# Altium PCB TX_Board.PcbDoc (part 3 of 5)
Units mm, origin at the board's own origin, x right, y up, seen from the top; angles counter-clockwise.
Board outline 69 x 69 mm, 4 copper layers (Top Layer, Int1 (GND), Int2 (GND), Bottom Layer), stack 1.591 mm thick; 102 components, 48 nets, 289 pads, 82 vias.
Unrouted connection lines stored in the file: 40.
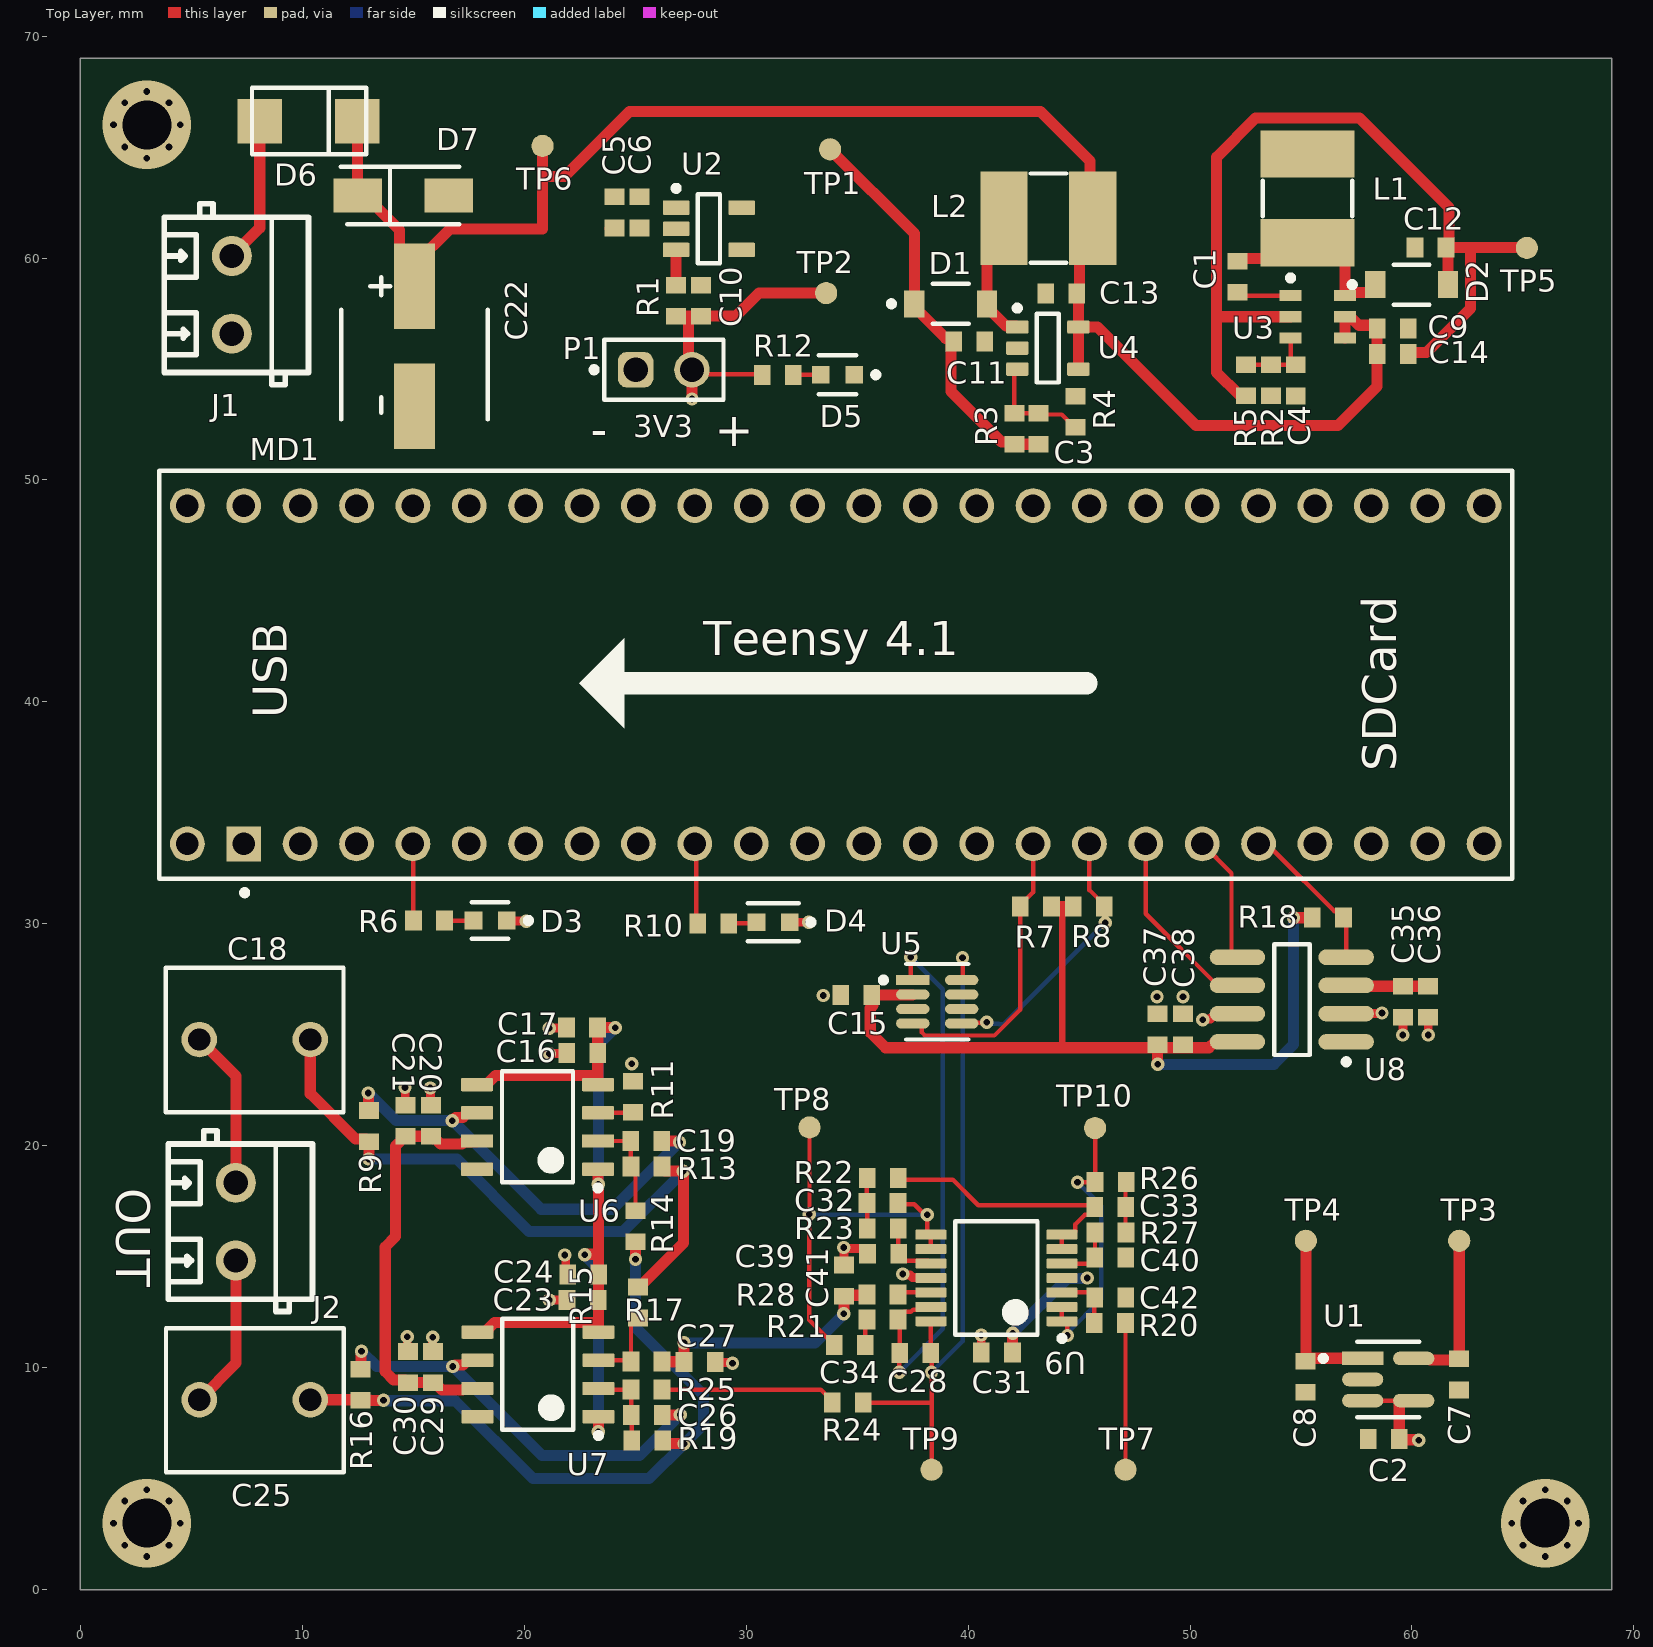
[diagram p0: Top Layer view]

## Part data (continued)
R2: library part RC0603FR-07309KL, "Res Thick Film 0603 309K Ohm 1% 0.1W(1/10W) ±100ppm/C Pad SMD T/R", Case Code (Imperial)=0603, JLCPCB Part Number=C273754, Manufacturer="Yageo Group", Max Operating Temperature=155°C, Max Power Dissipation=100mW, Min Operating Temperature=-55°C, Temperature Coefficient=100ppm/°C, Tolerance=1%, Voltage Rating=75V, Voltage Rating (DC)=50V, Case/Package=0603, Category="Chip SMD Resistors", China RoHS=Non-Compliant, ComponentLink1Description=https://datasheet.octopart.com:443/RC0603FR-07309KL-Yageo-datasheet-175887523.pdf?src-supplier=Newark, ComponentLink1URL=https://datasheet.octopart.com:443/RC0603FR-07309KL-Yageo-datasheet-175887523.pdf?src-supplier=Newark, ComponentLink2Description=https://datasheet.octopart.com:443/RC0603FR-07309KL-Yageo-datasheet-103092701.pdf?src-supplier=Upverter, ComponentLink2URL=https://datasheet.octopart.com:443/RC0603FR-07309KL-Yageo-datasheet-103092701.pdf?src-supplier=Upverter, ComponentLink3Description=https://datasheet.octopart.com:443/RC0603FR-07309KL-Yageo-Group-datasheet-176638170.pdf?src-supplier=Future+Electronics, ComponentLink3URL=https://datasheet.octopart.com:443/RC0603FR-07309KL-Yageo-Group-datasheet-176638170.pdf?src-supplier=Future+Electronics, ComponentLink4Description=https://datasheet.octopart.com:443/RC0603FR-07309KL-Yageo-datasheet-164759695.pdf?src-supplier=Future+Electronics, ComponentLink4URL=https://datasheet.octopart.com:443/RC0603FR-07309KL-Yageo-datasheet-164759695.pdf?src-supplier=Future+Electronics, ComponentLink5Description=https://datasheet.octopart.com:443/RC0603FR-07309KL-Yageo-datasheet-137700087.pdf?src-supplier=Future+Electronics, ComponentLink5URL=https://datasheet.octopart.com:443/RC0603FR-07309KL-Yageo-datasheet-137700087.pdf?src-supplier=Future+Electronics, ComponentLink6Description=https://datasheet.octopart.com:443/RC0603FR-07309KL-Yageo-datasheet-127823281.pdf?src-supplier=Future+Electronics, ComponentLink6URL=https://datasheet.octopart.com:443/RC0603FR-07309KL-Yageo-datasheet-127823281.pdf?src-supplier=Future+Electronics, ComponentLink7Description=https://datasheet.octopart.com:443/RC0603FR-07309KL-Yageo-datasheet-15599030.pdf?src-supplier=Future+Electronics, ComponentLink7URL=https://datasheet.octopart.com:443/RC0603FR-07309KL-Yageo-datasheet-15599030.pdf?src-supplier=Future+Electronics, ComponentLink8Description=https://datasheet.octopart.com:443/RC0603FR-07309KL-Yageo-datasheet-12596169.pdf?src-supplier=Future+Electronics, ComponentLink8URL=https://datasheet.octopart.com:443/RC0603FR-07309KL-Yageo-datasheet-12596169.pdf?src-supplier=Future+Electronics, ComponentLink9Description=https://datasheet.octopart.com:443/RC0603FR-07309KL-Yageo-datasheet-8328172.pdf?src-supplier=Future+Electronics, ComponentLink9URL=https://datasheet.octopart.com:443/RC0603FR-07309KL-Yageo-datasheet-8328172.pdf?src-supplier=Future+Electronics, ComponentLink10Description=https://datasheet.octopart.com/RC0603FR-07309KL-Yageo-datasheet-73766026.pdf, ComponentLink10URL=https://datasheet.octopart.com/RC0603FR-07309KL-Yageo-datasheet-73766026.pdf, ComponentLink11Description=https://datasheet.octopart.com:443/RC0603FR-07309KL-Yageo-datasheet-118562.pdf?src-supplier=DigiKey, ComponentLink11URL=https://datasheet.octopart.com:443/RC0603FR-07309KL-Yageo-datasheet-118562.pdf?src-supplier=DigiKey, ComponentLink12Description=http://sigma.octopart.com:80/conflict_mineral_statement/Yageo-company-3.pdf?src-supplier=Compliance+Statements, ComponentLink12URL=http://sigma.octopart.com:80/conflict_mineral_statement/Yageo-company-3.pdf?src-supplier=Compliance+Statements, ComponentLink13Description=http://sigma.octopart.com:80/rohs_statement/Yageo-company-2.pdf?src-supplier=Compliance+Statements, ComponentLink13URL=http://sigma.octopart.com:80/rohs_statement/Yageo-company-2.pdf?src-supplier=Compliance+Statements, Composition="Thick Film", Country of Origin="Mainland China, Taiwan", Depth=800µm, Export Control Classification Number (ECCN) Code=EAR99, Features="Moisture Resistant", Harmonized Tariff Schedule (HTS) Code=8533.21.00.30, Height=450µm, Introduction Date=2004-09-22, Lead Free="Lead Free", Length=1.6mm, Lifecycle Status=Production, Manufacturer Part Number=RC0603FR-07309KL, Military Standard=Not, Mounting Technology="Surface Mount", Number of Terminals=2, Number of Terminations=2, Power Rating=100mW, Pricing="1=0.101, 25=0.015, 100=0.011, 250=0.010, 500=0.009, 1000=0.008, 2500=0.006 (USD)", REACH SVHC=Unaffected, RoHS=Compliant, Schedule B="8533210045, 8533210045|8533210045, 8533210045|8533210045|8533210045, 8533210045|8533210045|8533210045|8533210045", Stock=4091, Supplier=Avnet, Supplier Part Number=RC0603FR-07309KL, Termination=SMD/SMT, Width=800µm, Working Voltage=75V
R3: library part RT0603BRE07205KL, "100mW Thin Film Resistor ±50ppm/℃ ±0.1% 205kΩ 0603 Chip Resistor - Surface Mount ROHS", Case Code (Metric)=0603, JLCPCB Part Number=C861745, Manufacturer="Yageo Group", Max Operating Temperature=155°C, Max Power Dissipation=100mW, Min Operating Temperature=-55°C, Temperature Coefficient=50ppm/°C, Tolerance=0.1%, Voltage Rating=75V, Voltage Rating (DC)=50V, Case/Package=0603, Category="Chip SMD Resistors", China RoHS=Non-Compliant, ComponentLink1Description=https://datasheet.octopart.com:443/RT0603BRE07205KL-Yageo-datasheet-176402239.pdf?src-supplier=IHS, ComponentLink1URL=https://datasheet.octopart.com:443/RT0603BRE07205KL-Yageo-datasheet-176402239.pdf?src-supplier=IHS, ComponentLink2Description=https://datasheet.octopart.com:443/RT0603BRE07205KL-Yageo-datasheet-96443642.pdf?src-supplier=Upverter, ComponentLink2URL=https://datasheet.octopart.com:443/RT0603BRE07205KL-Yageo-datasheet-96443642.pdf?src-supplier=Upverter, ComponentLink3Description=https://datasheet.octopart.com:443/RT0603BRE07205KL-Yageo-Group-datasheet-188167888.pdf?src-supplier=LCSC, ComponentLink3URL=https://datasheet.octopart.com:443/RT0603BRE07205KL-Yageo-Group-datasheet-188167888.pdf?src-supplier=LCSC, ComponentLink4Description=https://datasheet.octopart.com:443/RT0603BRE07205KL-Yageo-Group-datasheet-141265893.pdf?src-supplier=ODG+(Origin+Data+Global), ComponentLink4URL=https://datasheet.octopart.com:443/RT0603BRE07205KL-Yageo-Group-datasheet-141265893.pdf?src-supplier=ODG+(Origin+Data+Global), ComponentLink5Description=https://datasheet.octopart.com/RT0603BRE07205KL-Yageo-datasheet-86813807.pdf, ComponentLink5URL=https://datasheet.octopart.com/RT0603BRE07205KL-Yageo-datasheet-86813807.pdf, ComponentLink6Description=http://sigma.octopart.com:80/conflict_mineral_statement/Yageo-company-3.pdf?src-supplier=Compliance+Statements, ComponentLink6URL=http://sigma.octopart.com:80/conflict_mineral_statement/Yageo-company-3.pdf?src-supplier=Compliance+Statements, ComponentLink7Description=http://sigma.octopart.com:80/rohs_statement/Yageo-company-2.pdf?src-supplier=Compliance+Statements, ComponentLink7URL=http://sigma.octopart.com:80/rohs_statement/Yageo-company-2.pdf?src-supplier=Compliance+Statements, Composition="Thin Film", Contact Plating=Tin, Country of Origin="Mainland China, Taiwan", Export Control Classification Number (ECCN) Code=EAR99, Harmonized Tariff Schedule (HTS) Code=8533.21.00.30, Height=450µm, Introduction Date=2008-07-11, Lead Free="Lead Free", Length=1.6mm, Lifecycle Status=Production, Manufacturer Part Number=RT0603BRE07205KL, Mounting Technology="Surface Mount", Number of Terminals=2, Number of Terminations=2, Packaging="Tape & Reel (TR)", Power Rating=100mW, Pricing="5000=0.0472, 10000=0.04696, 20000=0.04673, 40000=0.04649, 80000=0.04626 (USD)", Radiation Hardening=No, REACH SVHC=Unaffected, RoHS=Compliant, Supplier=Avnet, Supplier Part Number=RT0603BRE07205KL, Width=800µm, Working Voltage=75V
R4: library part RC0603FR-0712KL, "100mW Thick Film Resistors 75V ±100ppm/℃ ±1% 12kΩ 0603 Chip Resistor - Surface Mount ROHS", Case Code (Imperial)=0603, Case Code (Metric)=1608, JLCPCB Part Number=C114659, Manufacturer="Yageo Group", Max Operating Temperature=155°C, Max Power Dissipation=100mW, Min Operating Temperature=-55°C, Temperature Coefficient=100ppm/°C, Tolerance=1%, Voltage Rating=50V, Working Voltage=75V, Case/Package=0603, Category="Chip SMD Resistors", China RoHS=Non-Compliant, ComponentLink1Description=https://datasheet.octopart.com:443/RC0603FR-0712KL-Yageo-datasheet-175887523.pdf?src-supplier=IHS, ComponentLink1URL=https://datasheet.octopart.com:443/RC0603FR-0712KL-Yageo-datasheet-175887523.pdf?src-supplier=IHS, ComponentLink2Description=https://datasheet.octopart.com:443/RC0603FR-0712KL-Yageo-datasheet-8328172.pdf?src-supplier=Newark, ComponentLink2URL=https://datasheet.octopart.com:443/RC0603FR-0712KL-Yageo-datasheet-8328172.pdf?src-supplier=Newark, ComponentLink3Description=https://datasheet.octopart.com:443/RC0603FR-0712KL-Yageo-datasheet-175423674.pdf?src-supplier=Newark, ComponentLink3URL=https://datasheet.octopart.com:443/RC0603FR-0712KL-Yageo-datasheet-175423674.pdf?src-supplier=Newark, ComponentLink4Description=https://datasheet.octopart.com:443/RC0603FR-0712KL-Yageo-datasheet-34211833.pdf?src-supplier=Newark, ComponentLink4URL=https://datasheet.octopart.com:443/RC0603FR-0712KL-Yageo-datasheet-34211833.pdf?src-supplier=Newark, ComponentLink5Description=https://datasheet.octopart.com:443/RC0603FR-0712KL-Yageo-datasheet-62067350.pdf?src-supplier=element14+APAC, ComponentLink5URL=https://datasheet.octopart.com:443/RC0603FR-0712KL-Yageo-datasheet-62067350.pdf?src-supplier=element14+APAC, ComponentLink6Description=https://datasheet.octopart.com:443/RC0603FR-0712KL-Yageo-datasheet-103092701.pdf?src-supplier=Upverter, ComponentLink6URL=https://datasheet.octopart.com:443/RC0603FR-0712KL-Yageo-datasheet-103092701.pdf?src-supplier=Upverter, ComponentLink7Description=https://datasheet.octopart.com:443/RC0603FR-0712KL-Yageo-datasheet-141435368.pdf?src-supplier=Upverter, ComponentLink7URL=https://datasheet.octopart.com:443/RC0603FR-0712KL-Yageo-datasheet-141435368.pdf?src-supplier=Upverter, ComponentLink8Description=https://datasheet.octopart.com:443/RC0603FR-0712KL-Yageo-Group-datasheet-190305687.pdf?src-supplier=Future+Electronics, ComponentLink8URL=https://datasheet.octopart.com:443/RC0603FR-0712KL-Yageo-Group-datasheet-190305687.pdf?src-supplier=Future+Electronics, ComponentLink9Description=https://datasheet.octopart.com:443/RC0603FR-0712KL-Yageo-datasheet-164759695.pdf?src-supplier=Future+Electronics, ComponentLink9URL=https://datasheet.octopart.com:443/RC0603FR-0712KL-Yageo-datasheet-164759695.pdf?src-supplier=Future+Electronics, ComponentLink10Description=https://datasheet.octopart.com:443/RC0603FR-0712KL-Yageo-datasheet-137700087.pdf?src-supplier=Future+Electronics, ComponentLink10URL=https://datasheet.octopart.com:443/RC0603FR-0712KL-Yageo-datasheet-137700087.pdf?src-supplier=Future+Electronics, ComponentLink11Description=https://datasheet.octopart.com:443/RC0603FR0712KL-Yageo-datasheet-27584510.pdf?src-supplier=Future+Electronics, ComponentLink11URL=https://datasheet.octopart.com:443/RC0603FR0712KL-Yageo-datasheet-27584510.pdf?src-supplier=Future+Electronics, ComponentLink12Description=https://datasheet.octopart.com:443/RC0603FR-0712KL-Yageo-datasheet-15599030.pdf?src-supplier=Future+Electronics, ComponentLink12URL=https://datasheet.octopart.com:443/RC0603FR-0712KL-Yageo-datasheet-15599030.pdf?src-supplier=Future+Electronics, ComponentLink13Description=https://datasheet.octopart.com:443/RC0603FR-0712KL-Yageo-datasheet-12596169.pdf?src-supplier=Future+Electronics, ComponentLink13URL=https://datasheet.octopart.com:443/RC0603FR-0712KL-Yageo-datasheet-12596169.pdf?src-supplier=Future+Electronics, ComponentLink14Description=https://datasheet.octopart.com:443/RC0603FR-0712KL-Yageo-datasheet-8324193.pdf?src-supplier=Future+Electronics, ComponentLink14URL=https://datasheet.octopart.com:443/RC0603FR-0712KL-Yageo-datasheet-8324193.pdf?src-supplier=Future+Electronics, ComponentLink15Description=https://datasheet.octopart.com:443/RC0603FR-0712KL-Yageo-Group-datasheet-189192902.pdf?src-supplier=LCSC, ComponentLink15URL=https://datasheet.octopart.com:443/RC0603FR-0712KL-Yageo-Group-datasheet-189192902.pdf?src-supplier=LCSC, ComponentLink16Description=https://datasheet.octopart.com:443/RC0603FR-0712KL-Yageo-Group-datasheet-176638170.pdf?src-supplier=Farnell, ComponentLink16URL=https://datasheet.octopart.com:443/RC0603FR-0712KL-Yageo-Group-datasheet-176638170.pdf?src-supplier=Farnell, ComponentLink17Description=https://datasheet.octopart.com/RC0603FR-0712KL-Yageo-datasheet-73766026.pdf, ComponentLink17URL=https://datasheet.octopart.com/RC0603FR-0712KL-Yageo-datasheet-73766026.pdf, ComponentLink18Description=https://datasheet.octopart.com:443/RC0603FR-0712KL-Yageo-datasheet-30459151.pdf?src-supplier=Seeed+Studio, ComponentLink18URL=https://datasheet.octopart.com:443/RC0603FR-0712KL-Yageo-datasheet-30459151.pdf?src-supplier=Seeed+Studio, ComponentLink19Description=https://datasheet.octopart.com:443/RC0603FR-0712KL-Yageo-datasheet-118562.pdf?src-supplier=DigiKey, ComponentLink19URL=https://datasheet.octopart.com:443/RC0603FR-0712KL-Yageo-datasheet-118562.pdf?src-supplier=DigiKey, ComponentLink20Description=http://sigma.octopart.com:80/conflict_mineral_statement/Yageo-company-3.pdf?src-supplier=Compliance+Statements, ComponentLink20URL=http://sigma.octopart.com:80/conflict_mineral_statement/Yageo-company-3.pdf?src-supplier=Compliance+Statements, ComponentLink21Description=http://sigma.octopart.com:80/rohs_statement/Yageo-company-2.pdf?src-supplier=Compliance+Statements, ComponentLink21URL=http://sigma.octopart.com:80/rohs_statement/Yageo-company-2.pdf?src-supplier=Compliance+Statements, Composition="Thick Film", Depth=800µm, Features="Moisture Resistant", Height=450µm, Lead Free="Lead Free", Length=1.6mm, Lifecycle Status=Production, Manufacturer Part Number=RC0603FR-0712KL, Military Standard=Not, Mounting Technology="Surface Mount", Number of Terminals=2, Number of Terminations=2, Packaging="Tape and Reel", Pins=2, Power Rating=100mW, Pricing="1=0.101, 25=0.015, 100=0.011, 250=0.010, 500=0.009, 1000=0.008, 2500=0.006, 5000=0.004 (USD)", REACH SVHC=Unaffected, RoHS=Compliant, Schedule B="8533210045, 8533210045|8533210045|8533210045|8533210045|8533210045", Stock=210017, Supplier=Newark, Supplier Part Number=RC0603FR-0712KL, Termination=SMD/SMT, Voltage Rating (DC)=50V, Width=800µm
R5: library part RC0603FR-0711KL, "Res Thick Film 0603 11K Ohm 1% 0.1W(1/10W) ±100ppm/C Pad SMD T/R", Case Code (Imperial)=0603, JLCPCB Part Number=C137801, Manufacturer="Yageo Group", Max Operating Temperature=155°C, Max Power Dissipation=100mW, Min Operating Temperature=-55°C, Temperature Coefficient=100ppm/°C, Tolerance=1%, Voltage Rating=75V, Voltage Rating (DC)=50V, Case/Package=0603, Category="Chip SMD Resistors", China RoHS=Non-Compliant, ComponentLink1Description=https://datasheet.octopart.com:443/RC0603FR-0711KL-Yageo-datasheet-175887523.pdf?src-supplier=IHS, ComponentLink1URL=https://datasheet.octopart.com:443/RC0603FR-0711KL-Yageo-datasheet-175887523.pdf?src-supplier=IHS, ComponentLink2Description=https://datasheet.octopart.com:443/RC0603FR-0711KL-Yageo-datasheet-103092701.pdf?src-supplier=Upverter, ComponentLink2URL=https://datasheet.octopart.com:443/RC0603FR-0711KL-Yageo-datasheet-103092701.pdf?src-supplier=Upverter, ComponentLink3Description=https://datasheet.octopart.com:443/RC0603FR-0711KL-Yageo-Group-datasheet-190305687.pdf?src-supplier=Future+Electronics, ComponentLink3URL=https://datasheet.octopart.com:443/RC0603FR-0711KL-Yageo-Group-datasheet-190305687.pdf?src-supplier=Future+Electronics, ComponentLink4Description=https://datasheet.octopart.com:443/RC0603FR-0711KL-Yageo-datasheet-164759695.pdf?src-supplier=Future+Electronics, ComponentLink4URL=https://datasheet.octopart.com:443/RC0603FR-0711KL-Yageo-datasheet-164759695.pdf?src-supplier=Future+Electronics, ComponentLink5Description=https://datasheet.octopart.com:443/RC0603FR-0711KL-Yageo-datasheet-127823281.pdf?src-supplier=Future+Electronics, ComponentLink5URL=https://datasheet.octopart.com:443/RC0603FR-0711KL-Yageo-datasheet-127823281.pdf?src-supplier=Future+Electronics, ComponentLink6Description=https://datasheet.octopart.com:443/RC0603FR-0711KL-Yageo-datasheet-137700087.pdf?src-supplier=Future+Electronics, ComponentLink6URL=https://datasheet.octopart.com:443/RC0603FR-0711KL-Yageo-datasheet-137700087.pdf?src-supplier=Future+Electronics, ComponentLink7Description=https://datasheet.octopart.com:443/RC0603FR-0711KL-Yageo-datasheet-98239111.pdf?src-supplier=Future+Electronics, ComponentLink7URL=https://datasheet.octopart.com:443/RC0603FR-0711KL-Yageo-datasheet-98239111.pdf?src-supplier=Future+Electronics, ComponentLink8Description=https://datasheet.octopart.com:443/RC0603FR-0711KL-Yageo-datasheet-77992522.pdf?src-supplier=Future+Electronics, ComponentLink8URL=https://datasheet.octopart.com:443/RC0603FR-0711KL-Yageo-datasheet-77992522.pdf?src-supplier=Future+Electronics, ComponentLink9Description=https://datasheet.octopart.com:443/RC0603FR-0711KL-Yageo-datasheet-67302840.pdf?src-supplier=Future+Electronics, ComponentLink9URL=https://datasheet.octopart.com:443/RC0603FR-0711KL-Yageo-datasheet-67302840.pdf?src-supplier=Future+Electronics, ComponentLink10Description=https://datasheet.octopart.com:443/RC0603FR-0711KL-Yageo-datasheet-17842380.pdf?src-supplier=Future+Electronics, ComponentLink10URL=https://datasheet.octopart.com:443/RC0603FR-0711KL-Yageo-datasheet-17842380.pdf?src-supplier=Future+Electronics, ComponentLink11Description=https://datasheet.octopart.com:443/RC0603FR-0711KL-Yageo-datasheet-15599030.pdf?src-supplier=Future+Electronics, ComponentLink11URL=https://datasheet.octopart.com:443/RC0603FR-0711KL-Yageo-datasheet-15599030.pdf?src-supplier=Future+Electronics, ComponentLink12Description=https://datasheet.octopart.com:443/RC0603FR-0711KL-Yageo-datasheet-12596169.pdf?src-supplier=Future+Electronics, ComponentLink12URL=https://datasheet.octopart.com:443/RC0603FR-0711KL-Yageo-datasheet-12596169.pdf?src-supplier=Future+Electronics, ComponentLink13Description=https://datasheet.octopart.com:443/RC0603FR-0711KL-Yageo-datasheet-8324193.pdf?src-supplier=Future+Electronics, ComponentLink13URL=https://datasheet.octopart.com:443/RC0603FR-0711KL-Yageo-datasheet-8324193.pdf?src-supplier=Future+Electronics, ComponentLink14Description=https://datasheet.octopart.com:443/RC0603FR-0711KL-Yageo-datasheet-8328172.pdf?src-supplier=Newark, ComponentLink14URL=https://datasheet.octopart.com:443/RC0603FR-0711KL-Yageo-datasheet-8328172.pdf?src-supplier=Newark, ComponentLink15Description=https://datasheet.octopart.com:443/RC0603FR-0711KL-Yageo-datasheet-62067350.pdf?src-supplier=Farnell, ComponentLink15URL=https://datasheet.octopart.com:443/RC0603FR-0711KL-Yageo-datasheet-62067350.pdf?src-supplier=Farnell, ComponentLink16Description=https://datasheet.octopart.com:443/RC0603FR-0711KL-Yageo-datasheet-34211833.pdf?src-supplier=element14+APAC, ComponentLink16URL=https://datasheet.octopart.com:443/RC0603FR-0711KL-Yageo-datasheet-34211833.pdf?src-supplier=element14+APAC, ComponentLink17Description=https://datasheet.octopart.com:443/RC0603FR-0711KL-Yageo-Group-datasheet-189192902.pdf?src-supplier=LCSC, ComponentLink17URL=https://datasheet.octopart.com:443/RC0603FR-0711KL-Yageo-Group-datasheet-189192902.pdf?src-supplier=LCSC, ComponentLink18Description=https://datasheet.octopart.com/RC0603FR-0711KL-Yageo-datasheet-73766026.pdf, ComponentLink18URL=https://datasheet.octopart.com/RC0603FR-0711KL-Yageo-datasheet-73766026.pdf, ComponentLink19Description=https://datasheet.octopart.com:443/RC0603FR-0711KL-Yageo-datasheet-118562.pdf?src-supplier=DigiKey, ComponentLink19URL=https://datasheet.octopart.com:443/RC0603FR-0711KL-Yageo-datasheet-118562.pdf?src-supplier=DigiKey, ComponentLink20Description=http://sigma.octopart.com:80/conflict_mineral_statement/Yageo-company-3.pdf?src-supplier=Compliance+Statements, ComponentLink20URL=http://sigma.octopart.com:80/conflict_mineral_statement/Yageo-company-3.pdf?src-supplier=Compliance+Statements, ComponentLink21Description=http://sigma.octopart.com:80/rohs_statement/Yageo-company-2.pdf?src-supplier=Compliance+Statements, ComponentLink21URL=http://sigma.octopart.com:80/rohs_statement/Yageo-company-2.pdf?src-supplier=Compliance+Statements, Composition="Thick Film", Country of Origin="Mainland China, Taiwan", Depth=800µm, Export Control Classification Number (ECCN) Code=EAR99, Features="Moisture Resistant", Harmonized Tariff Schedule (HTS) Code=8533.21.00.30, Height=450µm, Introduction Date=2004-10-04, Lead Free="Lead Free", Length=1.6mm, Lifecycle Status=Production, Manufacturer Part Number=RC0603FR-0711KL, Military Standard=Not, Mounting Technology="Surface Mount", Number of Terminals=2, Number of Terminations=2, Packaging="Tape & Reel", Pins=2, Power Rating=100mW, Pricing="10=0.0098, 11=0.0068, 101=0.0055, 501=0.0042, 1001=0.0032 (USD)", REACH SVHC=Unaffected, RoHS=Compliant, Schedule B="8533210045, 8533210045|8533210045|8533210045|8533210045|8533210045", Stock=22877, Supplier=Newark, Supplier Part Number=RC0603FR-0711KL, Termination=SMD/SMT, Width=800µm, Working Voltage=75V
R6 R10 R12: library part 0603WAF1001T5E, "Res Thick Film 0603 1K Ohm 1% 0.1W(1/10W) ±100ppm/C Pad SMD T/R", Case/Package=0603, JLCPCB Part Number=C21190, Manufacturer="Royal Ohm", Max Operating Temperature=155°C, Min Operating Temperature=-55°C, Power Rating=100mW, Supplier Part Number=303-0603WAF1001T5E, Temperature Coefficient=100ppm/°C, Tolerance=1%, Working Voltage=75V, Category="Chip SMD Resistors", China RoHS=Non-Compliant, ComponentLink1Description=https://datasheet.octopart.com:443/0603WAF1001T5E-Royal-Electronics-datasheet-181080982.pdf?src-supplier=IHS, ComponentLink1URL=https://datasheet.octopart.com:443/0603WAF1001T5E-Royal-Electronics-datasheet-181080982.pdf?src-supplier=IHS, ComponentLink2Description=https://datasheet.octopart.com:443/0603WAF1001T5E-Royal-Ohm-datasheet-165785611.pdf?src-supplier=TME, ComponentLink2URL=https://datasheet.octopart.com:443/0603WAF1001T5E-Royal-Ohm-datasheet-165785611.pdf?src-supplier=TME, ComponentLink3Description=https://datasheet.octopart.com:443/0603WAF1001T5E-Royal-Ohm-datasheet-157855877.pdf?src-supplier=TME, ComponentLink3URL=https://datasheet.octopart.com:443/0603WAF1001T5E-Royal-Ohm-datasheet-157855877.pdf?src-supplier=TME, ComponentLink4Description=https://datasheet.octopart.com:443/0603WAF1001T5E-Royal-Ohm-datasheet-62069544.pdf?src-supplier=TME, ComponentLink4URL=https://datasheet.octopart.com:443/0603WAF1001T5E-Royal-Ohm-datasheet-62069544.pdf?src-supplier=TME, Country of Origin=Thailand, Export Control Classification Number (ECCN) Code=EAR99, Harmonized Tariff Schedule (HTS) Code=8533.21.00.30, Height=450µm, Introduction Date=2006-01-09, Length=1.6mm, Lifecycle Status=Production, Manufacturer Part Number=0603WAF1001T5E, Mounting Technology="Surface Mount", Number of Terminals=2, Pricing="10000=0.001 (USD)", REACH SVHC=Unaffected, RoHS=Compliant, Stock=260000, Supplier=Mouser, Width=800µm
R7 R8: library part RC0603FR-074K7L, "Yageo RC0603FR-074K7L Resistor 0603 SMD 4.7k Ohm 1% 100mW Thick Film", Case Code (Imperial)=0603, JLCPCB Part Number=C99782, Manufacturer="Yageo Group", Max Operating Temperature=155°C, Min Operating Temperature=-55°C, Power Rating=100mW, Temperature Coefficient=100ppm/°C, Tolerance=1%, Voltage Rating=75V, Voltage Rating (DC)=50V, Case/Package=0603, Category="Chip SMD Resistors", China RoHS=Non-Compliant, ComponentLink1Description=https://datasheet.octopart.com:443/RC0603FR-074K7L-Yageo-datasheet-175887523.pdf?src-supplier=IHS, ComponentLink1URL=https://datasheet.octopart.com:443/RC0603FR-074K7L-Yageo-datasheet-175887523.pdf?src-supplier=IHS, ComponentLink2Description=https://datasheet.octopart.com:443/RC0603FR-074K7L-Yageo-datasheet-103092701.pdf?src-supplier=Upverter, ComponentLink2URL=https://datasheet.octopart.com:443/RC0603FR-074K7L-Yageo-datasheet-103092701.pdf?src-supplier=Upverter, ComponentLink3Description=https://datasheet.octopart.com:443/RC0603FR-074K7L-Yageo-datasheet-8328172.pdf?src-supplier=Farnell, ComponentLink3URL=https://datasheet.octopart.com:443/RC0603FR-074K7L-Yageo-datasheet-8328172.pdf?src-supplier=Farnell, ComponentLink4Description=https://datasheet.octopart.com:443/RC0603FR-074K7L-Yageo-datasheet-13691069.pdf?src-supplier=Farnell, ComponentLink4URL=https://datasheet.octopart.com:443/RC0603FR-074K7L-Yageo-datasheet-13691069.pdf?src-supplier=Farnell, ComponentLink5Description=https://datasheet.octopart.com:443/RC0603FR-074K7L-Yageo-Group-datasheet-190305687.pdf?src-supplier=Future+Electronics, ComponentLink5URL=https://datasheet.octopart.com:443/RC0603FR-074K7L-Yageo-Group-datasheet-190305687.pdf?src-supplier=Future+Electronics, ComponentLink6Description=https://datasheet.octopart.com:443/RC0603FR-074K7L-Yageo-datasheet-164759695.pdf?src-supplier=Future+Electronics, ComponentLink6URL=https://datasheet.octopart.com:443/RC0603FR-074K7L-Yageo-datasheet-164759695.pdf?src-supplier=Future+Electronics, ComponentLink7Description=https://datasheet.octopart.com:443/RC0603FR-074K7L-Yageo-datasheet-137700087.pdf?src-supplier=Future+Electronics, ComponentLink7URL=https://datasheet.octopart.com:443/RC0603FR-074K7L-Yageo-datasheet-137700087.pdf?src-supplier=Future+Electronics, ComponentLink8Description=https://datasheet.octopart.com:443/RC0603FR074K7L-Yageo-datasheet-27584510.pdf?src-supplier=Future+Electronics, ComponentLink8URL=https://datasheet.octopart.com:443/RC0603FR074K7L-Yageo-datasheet-27584510.pdf?src-supplier=Future+Electronics, ComponentLink9Description=https://datasheet.octopart.com:443/RC0603FR-074K7L-Yageo-datasheet-15599030.pdf?src-supplier=Future+Electronics, ComponentLink9URL=https://datasheet.octopart.com:443/RC0603FR-074K7L-Yageo-datasheet-15599030.pdf?src-supplier=Future+Electronics, ComponentLink10Description=https://datasheet.octopart.com:443/RC0603FR-074K7L-Yageo-datasheet-175423674.pdf?src-supplier=Newark, ComponentLink10URL=https://datasheet.octopart.com:443/RC0603FR-074K7L-Yageo-datasheet-175423674.pdf?src-supplier=Newark, ComponentLink11Description=https://datasheet.octopart.com:443/RC0603FR-074K7L-Yageo-datasheet-12596169.pdf?src-supplier=Newark, ComponentLink11URL=https://datasheet.octopart.com:443/RC0603FR-074K7L-Yageo-datasheet-12596169.pdf?src-supplier=Newark, ComponentLink12Description=https://datasheet.octopart.com:443/RC0603FR-074K7L-Yageo-datasheet-503470.pdf?src-supplier=Newark, ComponentLink12URL=https://datasheet.octopart.com:443/RC0603FR-074K7L-Yageo-datasheet-503470.pdf?src-supplier=Newark, ComponentLink13Description=https://datasheet.octopart.com:443/RC0603FR-074K7L-Yageo-datasheet-34211833.pdf?src-supplier=element14+APAC, ComponentLink13URL=https://datasheet.octopart.com:443/RC0603FR-074K7L-Yageo-datasheet-34211833.pdf?src-supplier=element14+APAC, ComponentLink14Description=https://datasheet.octopart.com:443/RC0603FR-074K7L-Yageo-datasheet-62067350.pdf?src-supplier=element14+APAC, ComponentLink14URL=https://datasheet.octopart.com:443/RC0603FR-074K7L-Yageo-datasheet-62067350.pdf?src-supplier=element14+APAC, ComponentLink15Description=https://datasheet.octopart.com:443/RC0603FR-074K7L-Yageo-datasheet-17842380.pdf?src-supplier=element14+APAC, ComponentLink15URL=https://datasheet.octopart.com:443/RC0603FR-074K7L-Yageo-datasheet-17842380.pdf?src-supplier=element14+APAC, ComponentLink16Description=https://datasheet.octopart.com:443/RC0603FR-074K7L-Yageo-Group-datasheet-189192902.pdf?src-supplier=LCSC, ComponentLink16URL=https://datasheet.octopart.com:443/RC0603FR-074K7L-Yageo-Group-datasheet-189192902.pdf?src-supplier=LCSC, ComponentLink17Description=https://datasheet.octopart.com:443/RC0603FR-074K7L-Yageo-datasheet-79472498.pdf?src-supplier=Megastar, ComponentLink17URL=https://datasheet.octopart.com:443/RC0603FR-074K7L-Yageo-datasheet-79472498.pdf?src-supplier=Megastar, ComponentLink18Description=https://datasheet.octopart.com/RC0603FR-074K7L-Yageo-datasheet-73766026.pdf, ComponentLink18URL=https://datasheet.octopart.com/RC0603FR-074K7L-Yageo-datasheet-73766026.pdf, ComponentLink19Description=https://datasheet.octopart.com:443/RC0603FR-074K7L-Yageo-datasheet-118562.pdf?src-supplier=DigiKey, ComponentLink19URL=https://datasheet.octopart.com:443/RC0603FR-074K7L-Yageo-datasheet-118562.pdf?src-supplier=DigiKey, ComponentLink20Description=http://sigma.octopart.com:80/conflict_mineral_statement/Yageo-company-3.pdf?src-supplier=Compliance+Statements, ComponentLink20URL=http://sigma.octopart.com:80/conflict_mineral_statement/Yageo-company-3.pdf?src-supplier=Compliance+Statements, ComponentLink21Description=http://sigma.octopart.com:80/rohs_statement/Yageo-company-2.pdf?src-supplier=Compliance+Statements, ComponentLink21URL=http://sigma.octopart.com:80/rohs_statement/Yageo-company-2.pdf?src-supplier=Compliance+Statements, Composition="Thick Film", Contact Plating=Tin, Country of Origin="Mainland China, Taiwan", Depth=800µm, Export Control Classification Number (ECCN) Code=EAR99, Harmonized Tariff Schedule (HTS) Code=8533.21.00.30, Height=450µm, Introduction Date=2004-09-22, Lead Free="Lead Free", Lead Pitch=300µm, Length=1.6mm, Lifecycle Status=Production, Manufacturer Part Number=RC0603FR-074K7L, Military Standard=Not, Mounting Technology="Surface Mount", Number of Terminals=2, Packaging="Tape & Reel", Pins=2, Pricing="10=0.018, 20=0.016, 30=0.015, 50=0.013, 100=0.012, 250=0.011, 500=0.010, 1000=0.009 (USD)", Radiation Hardening=No, REACH SVHC=Unaffected, RoHS=Compliant, Schedule B="8533210045, 8533210045|8533210045|8533210045|8533210045|8533210045|8533210045|8533210045|8533210045|8533210045|8533210045|8533210045|8533210045|8533210045|8533210045|8533210045|8533210045|8533210045|8533210045|8533210045|8533210045|8533210045|8533210045|8533210045|85", Stock=339015, Supplier=Newark, Supplier Part Number=RC0603FR-074K7L, Termination=SMD/SMT, Width=800µm, Working Voltage=75V
R11 R23: library part RT0603BRD0715KL, "100mW Thin Film Resistor 75V ±25ppm/℃ ±0.1% 15kΩ 0603 Chip Resistor - Surface Mount ROHS", Case Code (Imperial)=0603, JLCPCB Part Number=C326733, Manufacturer="Yageo Group", Max Operating Temperature=155°C, Max Power Dissipation=100mW, Min Operating Temperature=-55°C, Temperature Coefficient=25ppm/°C, Tolerance=0.1%, Voltage Rating=75V, Voltage Rating (DC)=50V, Case/Package=0603, Category="Chip SMD Resistors", China RoHS=Non-Compliant, ComponentLink1Description=https://datasheet.octopart.com:443/RT0603BRD0715KL-Yageo-datasheet-176402239.pdf?src-supplier=Future+Electronics, ComponentLink1URL=https://datasheet.octopart.com:443/RT0603BRD0715KL-Yageo-datasheet-176402239.pdf?src-supplier=Future+Electronics, ComponentLink2Description=https://datasheet.octopart.com:443/RT0603BRD0715KL-Yageo-datasheet-169971040.pdf?src-supplier=Future+Electronics, ComponentLink2URL=https://datasheet.octopart.com:443/RT0603BRD0715KL-Yageo-datasheet-169971040.pdf?src-supplier=Future+Electronics, ComponentLink3Description=https://datasheet.octopart.com:443/RT0603BRD0715KL-Yageo-datasheet-166250672.pdf?src-supplier=Future+Electronics, ComponentLink3URL=https://datasheet.octopart.com:443/RT0603BRD0715KL-Yageo-datasheet-166250672.pdf?src-supplier=Future+Electronics, ComponentLink4Description=https://datasheet.octopart.com:443/RT0603BRD0715KL-Yageo-datasheet-136673517.pdf?src-supplier=Future+Electronics, ComponentLink4URL=https://datasheet.octopart.com:443/RT0603BRD0715KL-Yageo-datasheet-136673517.pdf?src-supplier=Future+Electronics, ComponentLink5Description=https://datasheet.octopart.com:443/RT0603BRD0715KL-Yageo-datasheet-137700930.pdf?src-supplier=Future+Electronics, ComponentLink5URL=https://datasheet.octopart.com:443/RT0603BRD0715KL-Yageo-datasheet-137700930.pdf?src-supplier=Future+Electronics, ComponentLink6Description=https://datasheet.octopart.com:443/RT0603BRD0715KL-Yageo-datasheet-41589729.pdf?src-supplier=Future+Electronics, ComponentLink6URL=https://datasheet.octopart.com:443/RT0603BRD0715KL-Yageo-datasheet-41589729.pdf?src-supplier=Future+Electronics, ComponentLink7Description=https://datasheet.octopart.com:443/RT0603BRD0715KL-Yageo-datasheet-12594463.pdf?src-supplier=Future+Electronics, ComponentLink7URL=https://datasheet.octopart.com:443/RT0603BRD0715KL-Yageo-datasheet-12594463.pdf?src-supplier=Future+Electronics, ComponentLink8Description=https://datasheet.octopart.com:443/RT0603BRD0715KL-Yageo-datasheet-10915759.pdf?src-supplier=Future+Electronics, ComponentLink8URL=https://datasheet.octopart.com:443/RT0603BRD0715KL-Yageo-datasheet-10915759.pdf?src-supplier=Future+Electronics, ComponentLink9Description=https://datasheet.octopart.com:443/RT0603BRD0715KL-Yageo-datasheet-34924148.pdf?src-supplier=Future+Electronics, ComponentLink9URL=https://datasheet.octopart.com:443/RT0603BRD0715KL-Yageo-datasheet-34924148.pdf?src-supplier=Future+Electronics, ComponentLink10Description=https://datasheet.octopart.com:443/RT0603BRD0715KL-Yageo-datasheet-96443642.pdf?src-supplier=Upverter, ComponentLink10URL=https://datasheet.octopart.com:443/RT0603BRD0715KL-Yageo-datasheet-96443642.pdf?src-supplier=Upverter, ComponentLink11Description=https://datasheet.octopart.com:443/RT0603BRD0715KL-Yageo-Group-datasheet-188167888.pdf?src-supplier=LCSC, ComponentLink11URL=https://datasheet.octopart.com:443/RT0603BRD0715KL-Yageo-Group-datasheet-188167888.pdf?src-supplier=LCSC, ComponentLink12Description=https://datasheet.octopart.com:443/RT0603BRD0715KL-Yageo-Group-datasheet-141265893.pdf?src-supplier=ODG+(Origin+Data+Global), ComponentLink12URL=https://datasheet.octopart.com:443/RT0603BRD0715KL-Yageo-Group-datasheet-141265893.pdf?src-supplier=ODG+(Origin+Data+Global), ComponentLink13Description=https://datasheet.octopart.com/RT0603BRD0715KL-Yageo-datasheet-86813807.pdf, ComponentLink13URL=https://datasheet.octopart.com/RT0603BRD0715KL-Yageo-datasheet-86813807.pdf, ComponentLink14Description=http://sigma.octopart.com:80/conflict_mineral_statement/Yageo-company-3.pdf?src-supplier=Compliance+Statements, ComponentLink14URL=http://sigma.octopart.com:80/conflict_mineral_statement/Yageo-company-3.pdf?src-supplier=Compliance+Statements, ComponentLink15Description=http://sigma.octopart.com:80/rohs_statement/Yageo-company-2.pdf?src-supplier=Compliance+Statements, ComponentLink15URL=http://sigma.octopart.com:80/rohs_statement/Yageo-company-2.pdf?src-supplier=Compliance+Statements, Composition="Thin Film", Contact Plating="Lead, Tin", Country of Origin="Mainland China, Taiwan", Depth=800µm, Export Control Classification Number (ECCN) Code=EAR99, Features="Moisture Resistant", Harmonized Tariff Schedule (HTS) Code=8533.21.00.30, Height=450µm, Introduction Date=2008-06-09, Lead Free="Lead Free", Length=1.6mm, Lifecycle Status=Production, Manufacturer Part Number=RT0603BRD0715KL, Military Standard=Not, Mounting Technology="Surface Mount", Number of Terminals=2, Number of Terminations=2, Power Rating=100mW, Pricing="5000=0.02359 (USD)", REACH SVHC=Unaffected, RoHS=Compliant, Schedule B="8533210045, 8533210045|8533210045|8533210045|8533210045|8533210045|8533210045|8533210045|8533210045|8533210045|8533210045|8533210045|8533210045|8533210045|8533210045|8533210045|8533210045|8533210045|8533210045|8533210045|8533210045|8533210045|8533210045|8533210045|85", Stock=895000, Supplier=Avnet, Supplier Part Number=RT0603BRD0715KL, Termination=SMD/SMT, Width=800µm, Working Voltage=75V
R13 R14: library part RT0603BRD0733KL, "Res Thin Film 0603 33K Ohm 0.1% 1/10W ±25ppm/°C Molded SMD SMD Paper T/R", Case Code (Imperial)=0603, JLCPCB Part Number=C705768, Manufacturer="Yageo Group", Max Operating Temperature=155°C, Max Power Dissipation=100mW, Min Operating Temperature=-55°C, Temperature Coefficient=25ppm/°C, Tolerance=0.1%, Voltage Rating=75V, Voltage Rating (DC)=50V, Case/Package=0603, Category="Chip SMD Resistors", China RoHS=Non-Compliant, ComponentLink1Description=https://datasheet.octopart.com:443/RT0603BRD0733KL-Yageo-datasheet-176402239.pdf?src-supplier=Future+Electronics, ComponentLink1URL=https://datasheet.octopart.com:443/RT0603BRD0733KL-Yageo-datasheet-176402239.pdf?src-supplier=Future+Electronics, ComponentLink2Description=https://datasheet.octopart.com:443/RT0603BRD0733KL-Yageo-datasheet-169971040.pdf?src-supplier=Future+Electronics, ComponentLink2URL=https://datasheet.octopart.com:443/RT0603BRD0733KL-Yageo-datasheet-169971040.pdf?src-supplier=Future+Electronics, ComponentLink3Description=https://datasheet.octopart.com:443/RT0603BRD0733KL-Yageo-datasheet-166250672.pdf?src-supplier=Future+Electronics, ComponentLink3URL=https://datasheet.octopart.com:443/RT0603BRD0733KL-Yageo-datasheet-166250672.pdf?src-supplier=Future+Electronics, ComponentLink4Description=https://datasheet.octopart.com:443/RT0603BRD0733KL-Yageo-datasheet-136673517.pdf?src-supplier=Future+Electronics, ComponentLink4URL=https://datasheet.octopart.com:443/RT0603BRD0733KL-Yageo-datasheet-136673517.pdf?src-supplier=Future+Electronics, ComponentLink5Description=https://datasheet.octopart.com:443/RT0603BRD0733KL-Yageo-datasheet-137700930.pdf?src-supplier=Future+Electronics, ComponentLink5URL=https://datasheet.octopart.com:443/RT0603BRD0733KL-Yageo-datasheet-137700930.pdf?src-supplier=Future+Electronics, ComponentLink6Description=https://datasheet.octopart.com:443/RT0603BRD0733KL-Yageo-datasheet-41589729.pdf?src-supplier=Future+Electronics, ComponentLink6URL=https://datasheet.octopart.com:443/RT0603BRD0733KL-Yageo-datasheet-41589729.pdf?src-supplier=Future+Electronics, ComponentLink7Description=https://datasheet.octopart.com:443/RT0603BRD0733KL-Yageo-datasheet-12594463.pdf?src-supplier=Future+Electronics, ComponentLink7URL=https://datasheet.octopart.com:443/RT0603BRD0733KL-Yageo-datasheet-12594463.pdf?src-supplier=Future+Electronics, ComponentLink8Description=https://datasheet.octopart.com:443/RT0603BRD0733KL-Yageo-datasheet-34924148.pdf?src-supplier=Future+Electronics, ComponentLink8URL=https://datasheet.octopart.com:443/RT0603BRD0733KL-Yageo-datasheet-34924148.pdf?src-supplier=Future+Electronics, ComponentLink9Description=https://datasheet.octopart.com:443/RT0603BRD0733KL-Yageo-datasheet-96443642.pdf?src-supplier=Upverter, ComponentLink9URL=https://datasheet.octopart.com:443/RT0603BRD0733KL-Yageo-datasheet-96443642.pdf?src-supplier=Upverter, ComponentLink10Description=https://datasheet.octopart.com:443/RT0603BRD0733KL-Yageo-Group-datasheet-188167888.pdf?src-supplier=LCSC, ComponentLink10URL=https://datasheet.octopart.com:443/RT0603BRD0733KL-Yageo-Group-datasheet-188167888.pdf?src-supplier=LCSC, ComponentLink11Description=https://datasheet.octopart.com:443/RT0603BRD0733KL-Yageo-datasheet-10915759.pdf?src-supplier=_legacy+Avnet, ComponentLink11URL=https://datasheet.octopart.com:443/RT0603BRD0733KL-Yageo-datasheet-10915759.pdf?src-supplier=_legacy+Avnet, ComponentLink12Description=https://datasheet.octopart.com:443/RT0603BRD0733KL-Yageo-Group-datasheet-141265893.pdf?src-supplier=ODG+(Origin+Data+Global), ComponentLink12URL=https://datasheet.octopart.com:443/RT0603BRD0733KL-Yageo-Group-datasheet-141265893.pdf?src-supplier=ODG+(Origin+Data+Global), ComponentLink13Description=https://datasheet.octopart.com/RT0603BRD0733KL-Yageo-datasheet-86813807.pdf, ComponentLink13URL=https://datasheet.octopart.com/RT0603BRD0733KL-Yageo-datasheet-86813807.pdf, ComponentLink14Description=http://sigma.octopart.com:80/conflict_mineral_statement/Yageo-company-3.pdf?src-supplier=Compliance+Statements, ComponentLink14URL=http://sigma.octopart.com:80/conflict_mineral_statement/Yageo-company-3.pdf?src-supplier=Compliance+Statements, ComponentLink15Description=http://sigma.octopart.com:80/rohs_statement/Yageo-company-2.pdf?src-supplier=Compliance+Statements, ComponentLink15URL=http://sigma.octopart.com:80/rohs_statement/Yageo-company-2.pdf?src-supplier=Compliance+Statements, Composition="Thin Film", Contact Plating=Tin, Country of Origin="Mainland China, Taiwan", Depth=800µm, Export Control Classification Number (ECCN) Code=EAR99, Features="Moisture Resistant", Harmonized Tariff Schedule (HTS) Code=8533.21.00.30, Height=450µm, Introduction Date=2008-07-11, Lead Free="Lead Free", Length=1.6mm, Lifecycle Status=Production, Manufacturer Part Number=RT0603BRD0733KL, Military Standard=Not, Mounting Technology="Surface Mount", Number of Terminals=2, Number of Terminations=2, Power Rating=100mW, Pricing="10=0.0519, 11=0.0433, 101=0.0386, 501=0.0364, 1001=0.0357 (USD)", Radiation Hardening=No, REACH SVHC=Unaffected, RoHS=Compliant, Schedule B="8533210045, 8533210045|8533210045, 8533210045|8533210045|8533210045, 8533210045|8533210045|8533210045|8533210045", Stock=12000, Supplier=Newark, Supplier Part Number=RT0603BRD0733KL, Termination=SMD/SMT, Weight=2.012816mg, Width=800µm, Working Voltage=75V
R15 R19: library part RT0603BRD0768KL, "Res Thin Film 0603 68K Ohm 0.1% 1/10W ±25ppm/°C Molded SMD SMD Paper T/R", Case Code (Imperial)=0603, JLCPCB Part Number=C705793, Manufacturer="Yageo Group", Max Operating Temperature=155°C, Min Operating Temperature=-55°C, Power Rating=100mW, Temperature Coefficient=25ppm/°C, Tolerance=0.1%, Voltage Rating=75V, Voltage Rating (DC)=50V, Case/Package=0603, Category="Chip SMD Resistors", China RoHS=Non-Compliant, ComponentLink1Description=https://datasheet.octopart.com:443/RT0603BRD0768KL-Yageo-datasheet-176402239.pdf?src-supplier=Future+Electronics, ComponentLink1URL=https://datasheet.octopart.com:443/RT0603BRD0768KL-Yageo-datasheet-176402239.pdf?src-supplier=Future+Electronics, ComponentLink2Description=https://datasheet.octopart.com:443/RT0603BRD0768KL-Yageo-datasheet-169971040.pdf?src-supplier=Future+Electronics, ComponentLink2URL=https://datasheet.octopart.com:443/RT0603BRD0768KL-Yageo-datasheet-169971040.pdf?src-supplier=Future+Electronics, ComponentLink3Description=https://datasheet.octopart.com:443/RT0603BRD0768KL-Yageo-datasheet-166250672.pdf?src-supplier=Future+Electronics, ComponentLink3URL=https://datasheet.octopart.com:443/RT0603BRD0768KL-Yageo-datasheet-166250672.pdf?src-supplier=Future+Electronics, ComponentLink4Description=https://datasheet.octopart.com:443/RT0603BRD0768KL-Yageo-datasheet-136673517.pdf?src-supplier=Future+Electronics, ComponentLink4URL=https://datasheet.octopart.com:443/RT0603BRD0768KL-Yageo-datasheet-136673517.pdf?src-supplier=Future+Electronics, ComponentLink5Description=https://datasheet.octopart.com:443/RT0603BRD0768KL-Yageo-datasheet-137700930.pdf?src-supplier=Future+Electronics, ComponentLink5URL=https://datasheet.octopart.com:443/RT0603BRD0768KL-Yageo-datasheet-137700930.pdf?src-supplier=Future+Electronics, ComponentLink6Description=https://datasheet.octopart.com:443/RT0603BRD0768KL-Yageo-datasheet-96443642.pdf?src-supplier=Upverter, ComponentLink6URL=https://datasheet.octopart.com:443/RT0603BRD0768KL-Yageo-datasheet-96443642.pdf?src-supplier=Upverter, ComponentLink7Description=https://datasheet.octopart.com:443/RT0603BRD0768KL-Yageo-Group-datasheet-188167888.pdf?src-supplier=LCSC, ComponentLink7URL=https://datasheet.octopart.com:443/RT0603BRD0768KL-Yageo-Group-datasheet-188167888.pdf?src-supplier=LCSC, ComponentLink8Description=https://datasheet.octopart.com:443/RT0603BRD0768KL-Yageo-Group-datasheet-141265893.pdf?src-supplier=ODG+(Origin+Data+Global), ComponentLink8URL=https://datasheet.octopart.com:443/RT0603BRD0768KL-Yageo-Group-datasheet-141265893.pdf?src-supplier=ODG+(Origin+Data+Global), ComponentLink9Description=https://datasheet.octopart.com:443/RT0603BRD0768KL-Yageo-datasheet-10915759.pdf?src-supplier=_legacy+Avnet, ComponentLink9URL=https://datasheet.octopart.com:443/RT0603BRD0768KL-Yageo-datasheet-10915759.pdf?src-supplier=_legacy+Avnet, ComponentLink10Description=https://datasheet.octopart.com/RT0603BRD0768KL-Yageo-datasheet-86813807.pdf, ComponentLink10URL=https://datasheet.octopart.com/RT0603BRD0768KL-Yageo-datasheet-86813807.pdf, ComponentLink11Description=http://sigma.octopart.com:80/conflict_mineral_statement/Yageo-company-3.pdf?src-supplier=Compliance+Statements, ComponentLink11URL=http://sigma.octopart.com:80/conflict_mineral_statement/Yageo-company-3.pdf?src-supplier=Compliance+Statements, ComponentLink12Description=http://sigma.octopart.com:80/rohs_statement/Yageo-company-2.pdf?src-supplier=Compliance+Statements, ComponentLink12URL=http://sigma.octopart.com:80/rohs_statement/Yageo-company-2.pdf?src-supplier=Compliance+Statements, Composition="Thin Film", Contact Plating=Tin, Depth=800µm, Height=450µm, Lead Free="Lead Free", Length=1.6mm, Lifecycle Status=Production, Manufacturer Part Number=RT0603BRD0768KL, Military Standard=Not, Mounting Technology="Surface Mount", Number of Terminals=2, Pricing="10=0.065, 20=0.064, 30=0.063, 50=0.062, 100=0.061, 250=0.058, 500=0.055, 1000=0.054 (USD)", Radiation Hardening=No, REACH SVHC=Unaffected, RoHS=Compliant, Schedule B="8533210045, 8533210045|8533210045, 8533210045|8533210045|8533210045, 8533210045|8533210045|8533210045|8533210045", Stock=6340, Supplier=Newark, Supplier Part Number=RT0603BRD0768KL, Termination=SMD/SMT, Width=800µm, Working Voltage=75V